# Altium PCB Bopit_pcb.PcbDoc
Units mil, origin at the board's own origin, x right, y up, seen from the top; angles counter-clockwise.
Board outline 2190 x 2275 mil, 2 copper layers (Top Layer, Bottom Layer); 20 components, 20 nets, 85 pads, 1 vias.
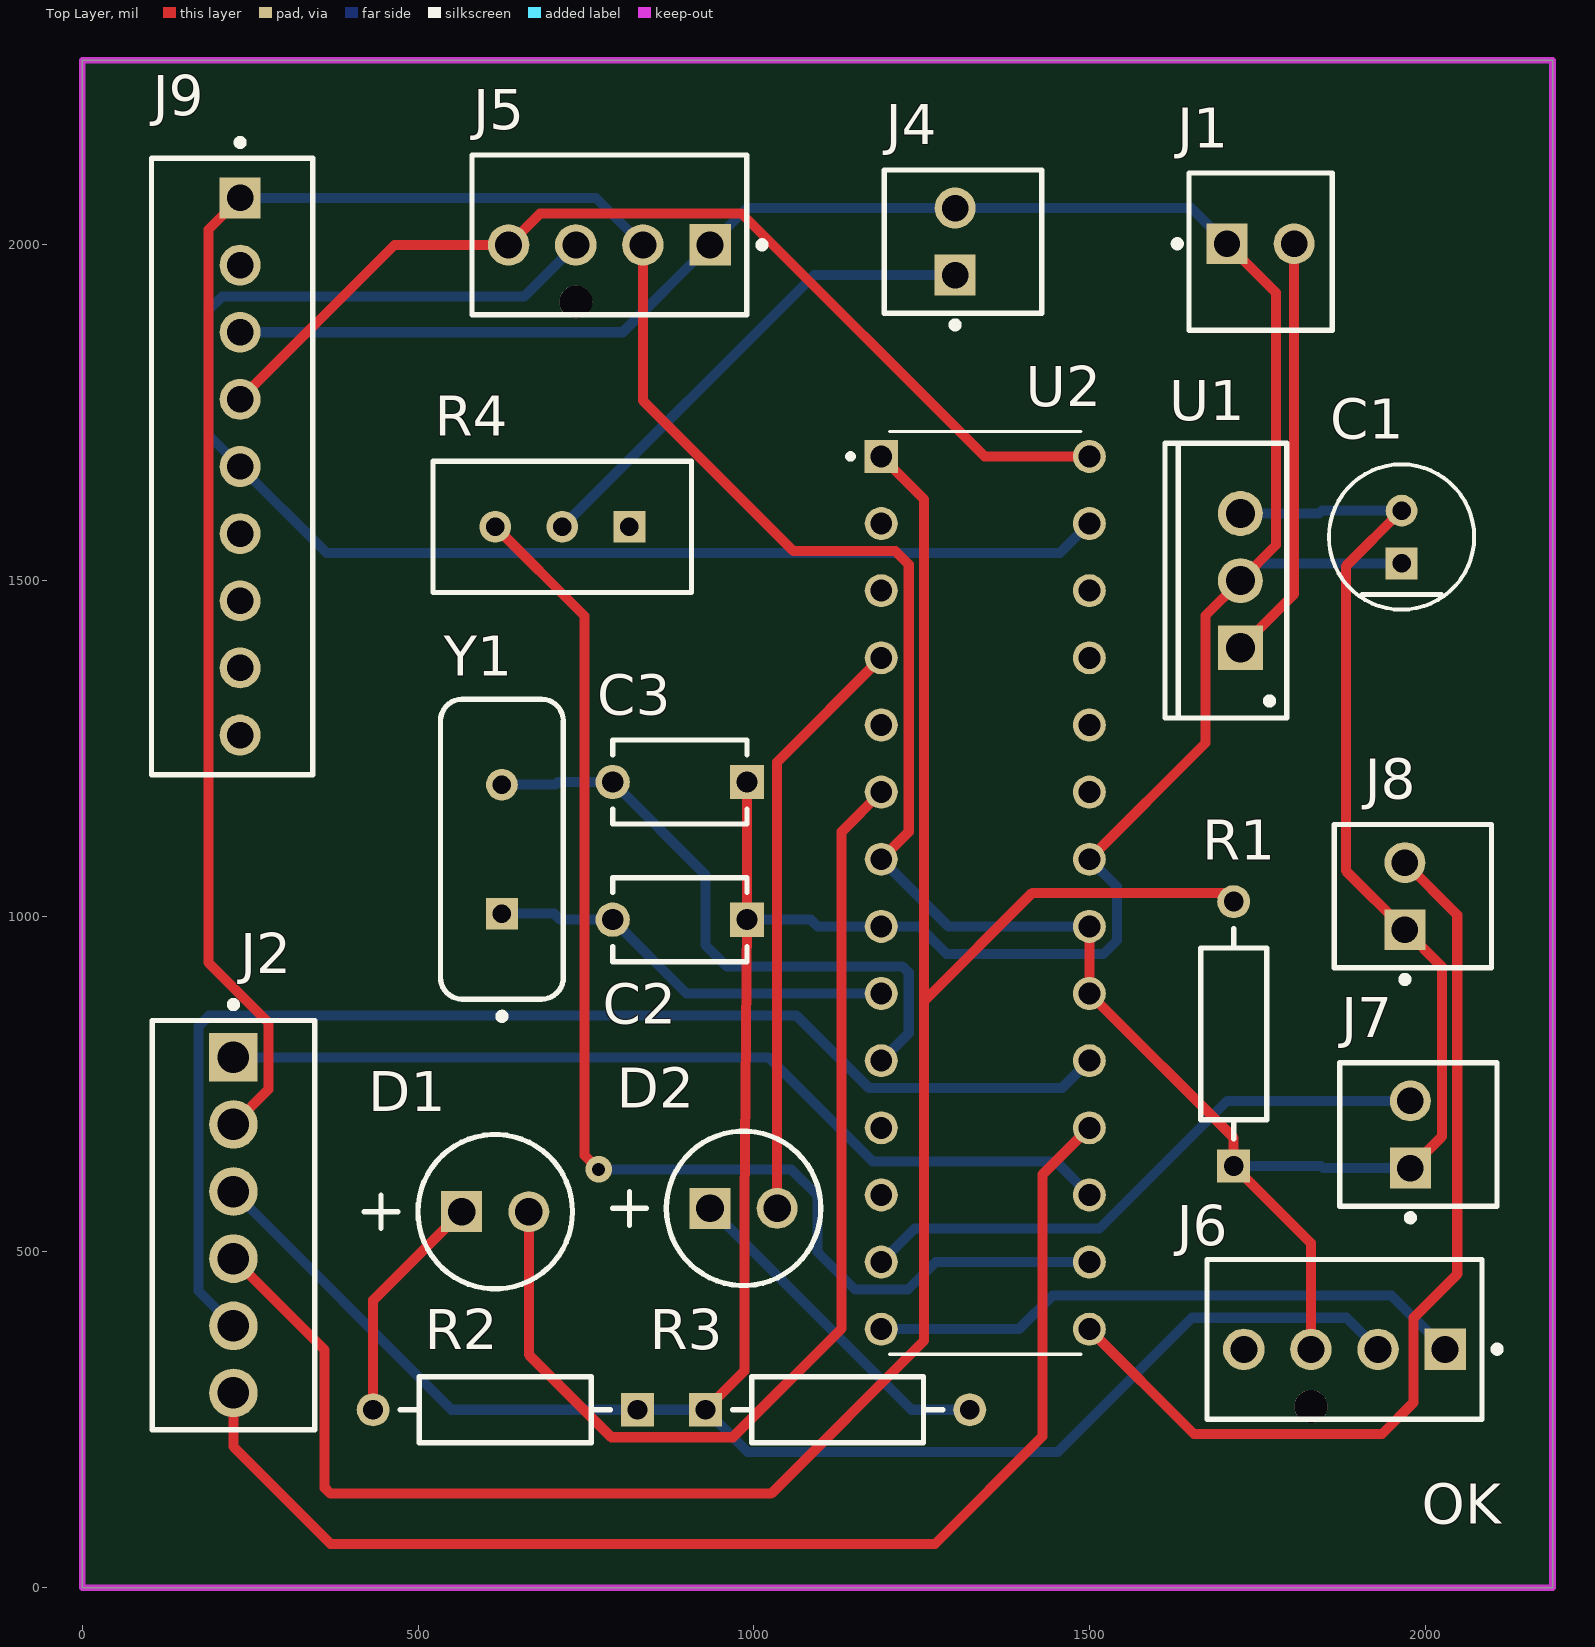
[diagram p0: Top Layer view]
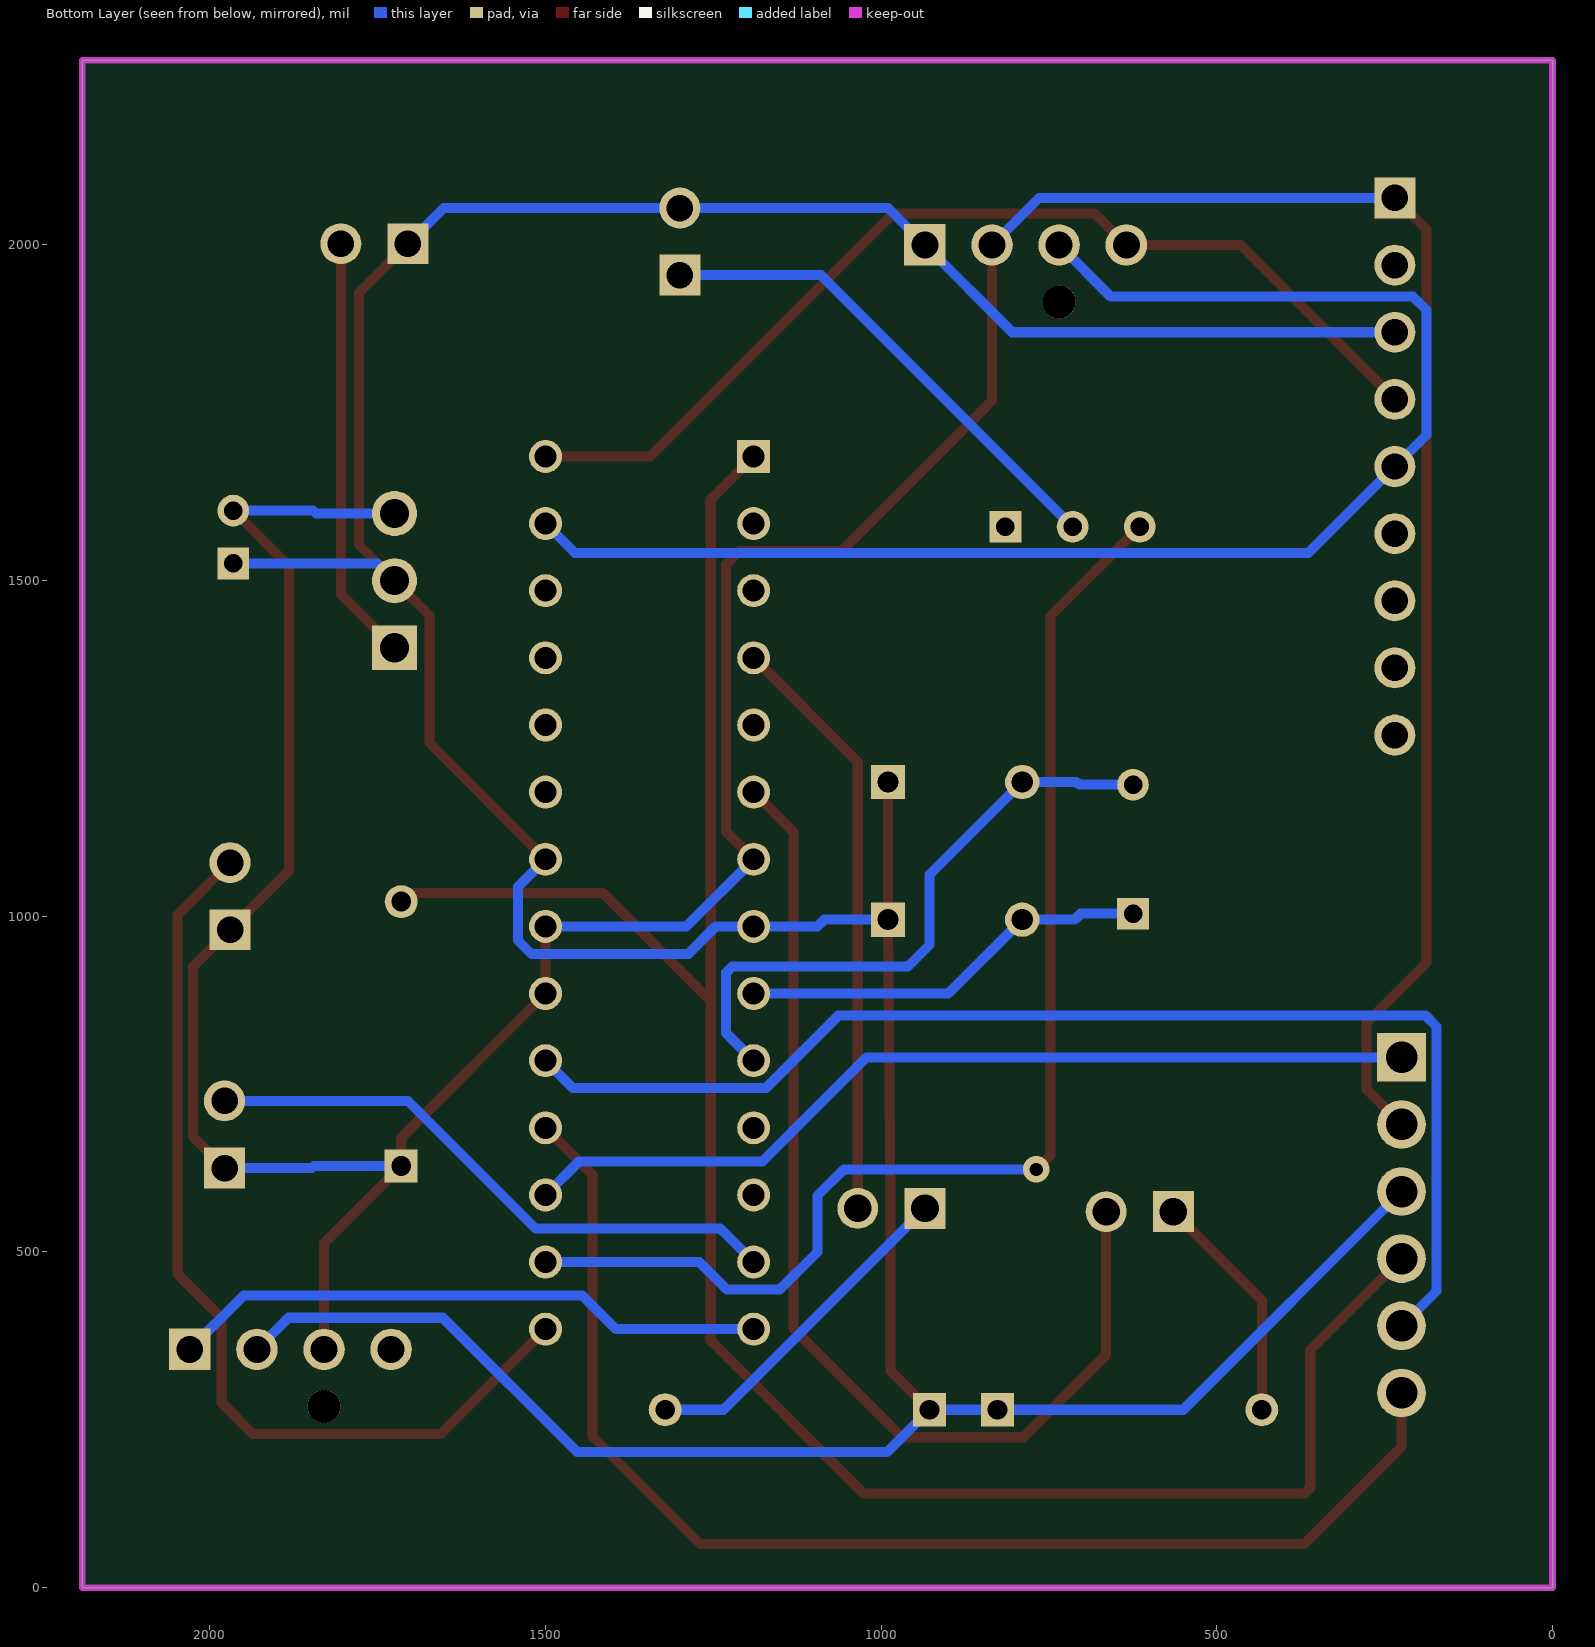
[diagram p1: Bottom Layer view, seen from below]
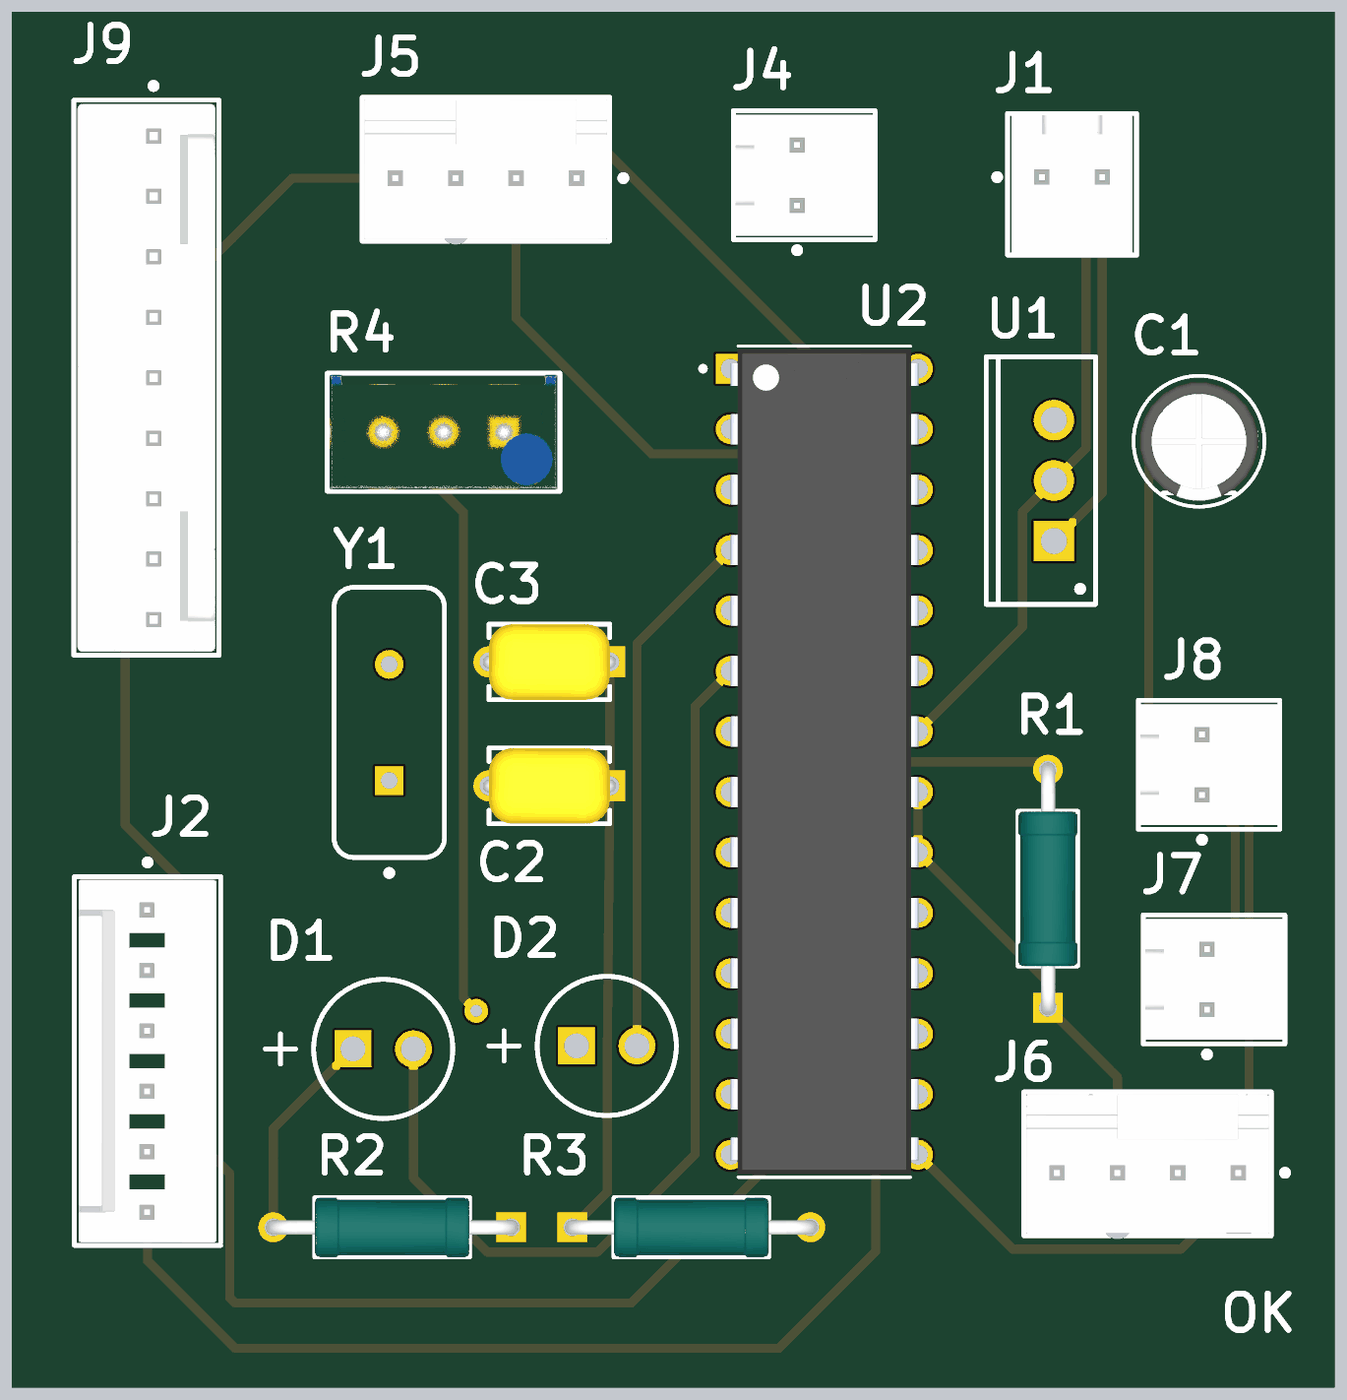
[diagram p2: 3D render of the assembled board from above, using the file's embedded part models]

## Layer stack, top to bottom
Top Solder: solder mask 0.4, Solder Resist, Dk 3.5
Top Layer: signal copper 1.4
Dielectric 1: dielectric 12.6, FR-4, Dk 4.8
Bottom Layer: signal copper 1.4
Bottom Solder: solder mask 0.4, Solder Resist, Dk 3.5

## Board outline
0,0 2190,0 2190,2275 0,2275

## Design rules (kind name [scope] priority, off if disabled: settings)
BoardOutlineClearance [All] p1: gap=7.87 ignorepadtopadclearanceinfootprint=FALSE except(15.75: Arc-SplitBarrior Arc-SplitContinuation Track-SplitBarrior Track-SplitContinuation SMDPad-SplitBarrior SMDPad-SplitContinuation THPad-SplitBarrior THPad-SplitContinuation Via-SplitBarrior Via-SplitContinuation Fill-SplitBarrior Fill-SplitContinuation Poly-SplitBarrior Poly-SplitContinuation Region-SplitBarrior Region-SplitContinuation Text-SplitBarrior Text-SplitContinuation)
Clearance "Clearance Bottom Layer" [OnLayer('Bottom Layer')] p1: gap=8 ignorepadtopadclearanceinfootprint=TRUE except(10: Arc-Text Track-Text SMDPad-Text THPad-Text Via-Text Fill-Text Poly-Text Region-Text Text-Text)
Clearance "Clearance Top Layer" [OnLayer('Top Layer')] p2: gap=8 ignorepadtopadclearanceinfootprint=TRUE except(10: Arc-Text Track-Text SMDPad-Text THPad-Text Via-Text Fill-Text Poly-Text Region-Text Text-Text)
Clearance [All] p3: gap=7.87 ignorepadtopadclearanceinfootprint=FALSE except(3.5: Arc-Arc Arc-Track Arc-SMDPad Track-Track Track-SMDPad SMDPad-SMDPad; 5: Arc-Via Track-Via SMDPad-Via THPad-Via Via-Via; 10: Arc-Text Track-Text SMDPad-Text THPad-Text Via-Text Fill-Text Poly-Text Region-Text Text-Text)
HoleSize [All] p1: absolutevalues=TRUE maxlimit=248.03 minlimit=7.87 maxpercent=80.000 minpercent=20.000
MinimumAnnularRing [All] p1: minimumring=3
MinimumSolderMaskSliver [All] p1: minsoldermaskwidth=3.94
PolygonConnect PolygonConnect_1 [All] p1: thpad.connectstyle=Relief thpad.reliefconductorwidth=20 thpad.reliefentries=4 thpad.polygonreliefangle="90 Angle" thpad.airgapwidth=10 smdpad.connectstyle=Relief smdpad.reliefconductorwidth=20 smdpad.reliefentries=4 smdpad.polygonreliefangle="90 Angle" smdpad.airgapwidth=10 via.connectstyle=Direct via.reliefconductorwidth=20 via.reliefentries=4 via.polygonreliefangle="90 Angle" via.airgapwidth=10
RoutingCorners [All] p1: cornerstyle=Round minsetback=100 maxsetback=100
RoutingVias [All] p1: holewidth=19.68 width=39.37 viastyle="Through Hole" minholewidth=7.87 minwidth=17.72 maxholewidth=39.37 maxwidth=78.74
SilkToSilkClearance [All] p1: silktosilkclearance=3.94
SilkToSolderMaskClearance [IsPad] p1: minsilkscreentomaskgap=3.94 clearancetoexposedcopper=TRUE
SolderMaskExpansion [All] p1: expansion=4 istentingtop=FALSE
Width [All] p1: maxlimit=100 minlimit=3.5 preferedwidth=15
25 further rules are at their usual default settings.

## Components (designator, comment, footprint, x,y, rotation, side; value= is the part's Value field where it differs from the comment)
C1 "10uF" FP-RAD-TH-D_5_0_5-L_11_1-MFG 1965,1565 r90 top
C2 "22 pF" FP-C322C104K5R5TA-MFG 890,995 r180 top
C3 "22 pF" FP-C322C104K5R5TA-MFG 890,1200 r180 top
D1 "Red" AVAG-HLMP-3301-2 565,560 r0 top
D2 "Green" AVAG-HLMP-3301-2 935,565 r0 top
J1 "Battery" FP-61900211121-MFG 1755,1990 r0 top
J2 "Input Code Pins" FP-22-27-2061-MFG 225,540 r270 top
J4 "Speaker" FP-61900211121-MFG 1311.81,2005 r90 top
J5 "Screen" FP-47053-3000-MFG 785,2014.96 r0 top
J6 "Sound Sensor" FP-47053-3000-MFG 1880,369.96 r0 top
J7 "Buy Button" FP-61900211121-MFG 1990,675 r90 top
J8 "Start input" FP-61900211121-MFG 1981.81,1030 r90 top
J9 "Gyroscope" FP-SWR25X-NRTC-S09-ST-BA-MFG 223.19,1670 r270 top
R1 "MRS25000C1001FCT00" FP-MRS25-MFG 1715,825 r90 top
R2 "MRS25000C1001FCT00" FP-MRS25-MFG 630,265 r180 top
R3 "MRS25000C1001FCT00" FP-MRS25-MFG 1125,265 r0 top
R4 "3296W-1-253LF" FP-3296W-MFG 715,1580 r90 top
U1 "5V Reg" TO220 1725,1500 r90 top
U2 "ATMEGA328-PU" DIP787W46P254L3467H508Q28 1345,1035 r0 top
Y1 "FOXSLF/080-20" FOX-FOXSLF080-20 625,1100 r90 top

## Footprints (in the part's own frame and the unit in brackets; to place one, negate y for a bottom-side part, rotate by r counter-clockwise, add the part's x,y. Pads: shape width x height; smd on the part's side, far side on the other; paste and mask are expansions set on the pad)
AVAG-HLMP-3301-2 [mm] "THD, 2-Leads, Body Dia 5.85mm"
  rect 1.55x1.55 hole 1.05: 1(0,0)
  round 1.55 hole 1.05: 2(2.54,0)
  silkscreen extent -3.68,-2.92 4.19,2.92
DIP787W46P254L3467H508Q28 [mm]
  rect 1.25x1.25 hole 0.83: 1(-3.937,16.51)
  round 1.25 hole 0.83: 2(-3.937,13.97) 3(-3.937,11.43) 4(-3.937,8.89) 5(-3.937,6.35) 6(-3.937,3.81) 7(-3.937,1.27) 8(-3.937,-1.27) 9(-3.937,-3.81) 10(-3.937,-6.35) 11(-3.937,-8.89) 12(-3.937,-11.43) 13(-3.937,-13.97) 14(-3.937,-16.51) 15(3.937,-16.51) 16(3.937,-13.97) 17(3.937,-11.43) 18(3.937,-8.89) 19(3.937,-6.35) 20(3.937,-3.81) 21(3.937,-1.27) 22(3.937,1.27) 23(3.937,3.81) 24(3.937,6.35) 25(3.937,8.89) 26(3.937,11.43) 27(3.937,13.97) 28(3.937,16.51)
  silkscreen extent -5.2,-17.45 3.62,17.45, body extent -3.95,-17.34 3.95,17.34, height 4.57
FOX-FOXSLF080-20 [mm] "THD, 2-Leads, Body 11.35x4.65mm"
  rect 1.2x1.2 hole 0.7: 1(-2.44,0)
  round 1.2 hole 0.7: 2(2.44,0)
  silkscreen extent -6.45,-2.33 5.68,2.33, body extent -5.67,-2.32 5.68,2.33, height 3.6
FP-22-27-2061-MFG [mm]
  rect 1.84x1.84 hole 1.19 paste-1000 mask+0: 1(-6.35,0)
  round 1.84 hole 1.19 paste-1000 mask+0: 2(-3.81,0) 3(-1.27,0) 4(1.27,0) 5(3.81,0) 6(6.35,0)
  silkscreen extent -8.47,-3.07 7.75,3.08, body extent -7.85,-3.18 7.85,3.17, height 0.25
FP-3296W-MFG [mm]
  rect 1.2x1.2 hole 0.7 paste-1000 mask+0: 1(0.005,-2.54)
  round 1.2 hole 0.7 paste-1000 mask+0: 2(0.005,0) 3(0.005,2.54)
  silkscreen extent -2.48,-4.89 2.48,4.89, body extent -2.58,-4.99 2.58,4.99, height 0.25
FP-47053-3000-MFG [mm]
  rect 1.57x1.57 hole 1.02 paste-1000 mask+0: 1(3.81,-0.38)
  round 1.57 hole 1.02 paste-1000 mask+0: 2(1.27,-0.38) 3(-1.27,-0.38) 4(-3.81,-0.38)
  round 1.25 hole 1.25 unplated paste-1000 mask+0: ""(-1.27,-2.54)
  silkscreen extent -5.2,-3.02 5.9,3.02, body extent -5.3,-3.26 5.3,3.12, height 0.25
FP-61900211121-MFG [mm]
  rect 1.55x1.55 hole 1 paste-1000 mask+0: 1(-1.27,0.3)
  round 1.55 hole 1 paste-1000 mask+0: 2(1.27,0.3)
  silkscreen extent -3.27,-2.98 2.71,2.98, body extent -2.81,-3.08 2.81,3.08, height 0.25
FP-C322C104K5R5TA-MFG [mm]
  rect 1.3x1.3 hole 0.8 paste-1000 mask+0: 1(-2.54,0)
  round 1.3 hole 0.8 paste-1000 mask+0: 2(2.54,0)
  silkscreen extent -2.54,-1.59 2.54,1.59, body extent -3.29,-1.69 3.29,1.69, height 0.25
FP-MRS25-MFG [mm]
  rect 1.25x1.25 hole 0.75 paste-1000 mask+0: 1(-5,0)
  round 1.25 hole 0.75 paste-1000 mask+0: 2(5,0)
  silkscreen extent -3.97,-1.25 3.97,1.25, body extent -5.72,-1.35 5.72,1.35, height 0.25
FP-RAD-TH-D_5_0_5-L_11_1-MFG [mm]
  rect 1.2x1.2 hole 0.7 paste-1000 mask+0: 1(-1,0)
  round 1.2 hole 0.7 paste-1000 mask+0: 2(1,0)
  silkscreen extent -2.75,-2.75 2.75,2.75, body extent -2.85,-2.85 2.85,2.85, height 0.25
FP-SWR25X-NRTC-S09-ST-BA-MFG [mm]
  rect 1.55x1.55 hole 1 paste-1000 mask+0: 1(-10.16,0.3)
  round 1.55 hole 1 paste-1000 mask+0: 2(-7.62,0.3) 3(-5.08,0.3) 4(-2.54,0.3) 5(0,0.3) 6(2.54,0.3) 7(5.08,0.3) 8(7.62,0.3) 9(10.16,0.3)
  silkscreen extent -12.38,-3.05 11.66,3.05, body extent -11.76,-3.15 11.76,3.15, height 0.25
TO220 [mm] "TO, Thru-Hole, Vertical, Heatsink Mounted; 3 In-Line Leads; Pitch 2.54 mm"
  rect 1.7x1.7 hole 1.1: 1(-2.54,0)
  round 1.7 hole 1.1: 2(0,0) 3(2.54,0)
  silkscreen extent -5.2,-1.75 5.2,2.85, body extent -5.25,-1.8 5.25,2.9, height 19.7

## Part data
C1: library part CMP-05427-000869-1, "Aluminum Electrolytic Capacitors (Radial Lead Type) 10uF ±20% 100V", Case/Package=Radial, Dielectric Material=Aluminium, Leakage Current=3uA, Max Operating Temperature=85°C, Min Operating Temperature=-40°C, Package Quantity=200, Ripple Current=70mA, Tolerance=20%, Voltage=100V, Capacitance=10uF, Construction=RADIAL, Contact Plating=Tin, Diameter=5mm, Dissipation Factor=0.1%, Height=11mm, Height - Seated (Max)=0.472inch, Lead Diameter=0.5mm, Lead Free="Lead Free", Lead Pitch=2mm, Lead/Base Style=Straight, Length=11mm, Life (Hours)=2000Hour, Mount="Through Hole", Number of Pins=2, Packaging=Bulk, Polarity=Polar, Radiation Hardening=No, REACH SVHC="No SVHC", Ripple Current (AC)=70mA, RoHS Compliant=Yes, Series=M, Termination=Radial, Voltage Rating=100V, Voltage Rating (DC)=100V, Width=5mm
C2 C3: library part CMP-03020-034661-1, "CAP CER 0.1UF 50V X7R RADIAL", Capacitance=100nF, Case/Package=Radial, Dielectric=X7R, Dielectric Material=Ceramic, Max Operating Temperature=125°C, Min Operating Temperature=-55°C, Package Quantity=500, Tolerance=10%, Voltage=50V, Construction=RADIAL, Depth=3.18mm, Dissipation Factor=2.5%, Height=3.18mm, Height - Seated (Max)=0.26inch, Lead Diameter=0.51mm, Lead Free="Lead Free", Lead Length=7mm, Lead Pitch=5.08mm, Lead/Base Style="Formed Leads", Length=5.08mm, Material=Ceramic, Mount="Through Hole", Number of Pins=2, Packaging=Bulk, Radiation Hardening=No, REACH SVHC="No SVHC", RoHS Compliant=Yes, Series="Golden Max™", Termination=Radial, Voltage Rating=50V, Voltage Rating (DC)=50V, Weight=0.0625lb, Width=0.125inch
D1: library part CMP-2000-06411-1, "T-1 3/4 (5 mm) Diffused LED Lamp, 1.9 V, -40 to 100 degC, 2-Pin THD, RoHS, Bulk", Forward Current=25mA, Forward Voltage=2.4V, Manufacturer=Avago, Operating Temp Range=-40Cto100C, Operating Temperature Classification=Industrial, Package Description="2-Pin Through Hole LED, Dia 5.85 mm", Package Reference=HLMP-3301, Package Type=T-13/4, Power Dissipation=85W, Reverse Voltage=5V, Test Current (It)=10mA, Chip Material=GaP, Datasheet URL=http://www.avagotech.com/docs/AV02-1558EN, Datasheet Version=03/2015, DELETED=Compliant, Dominant Wave Length=626nm, Emitting Color=Red, High Brightness=No, Lens Dimensions=5.08x5.08x8.3mm, Lens Type=ColoredDiffused, Lum Intensity=5.4mcd, Luminous Intensity=5.4mcd, Main Category=StandardLED, Manufacturer URL=http://www.avagotech.com/, Mounting=ThroughHole, Mounting Technology=ThroughHole, Number of  Elements=1, Packaging=TapeandReel, Peak Wavelength=635nm, Pin Count=2, Product Depth (mm)=6.1mm, Product Height (mm)=9.19mm, Product Length (mm)=6.1mm, Rad Hardened=No, Shape Type=Circular, Type=Uni-Color, Viewing Angle=60deg
D2: library part CMP-2000-06411-1, "T-1 3/4 (5 mm) Diffused LED Lamp, 1.9 V, -40 to 100 degC, 2-Pin THD, RoHS, Bulk", Emitting Color=Red, Forward Current=25mA, Forward Voltage=2.4V, Manufacturer=Avago, Operating Temp Range=-40Cto100C, Operating Temperature Classification=Industrial, Package Description="2-Pin Through Hole LED, Dia 5.85 mm", Package Reference=HLMP-3301, Package Type=T-13/4, Power Dissipation=85W, Reverse Voltage=5V, Test Current (It)=10mA, Chip Material=GaP, Datasheet URL=http://www.avagotech.com/docs/AV02-1558EN, Datasheet Version=03/2015, DELETED=Compliant, Dominant Wave Length=626nm, High Brightness=No, Lens Dimensions=5.08x5.08x8.3mm, Lens Type=ColoredDiffused, Lum Intensity=5.4mcd, Luminous Intensity=5.4mcd, Main Category=StandardLED, Manufacturer URL=http://www.avagotech.com/, Mounting=ThroughHole, Mounting Technology=ThroughHole, Number of  Elements=1, Packaging=TapeandReel, Peak Wavelength=635nm, Pin Count=2, Product Depth (mm)=6.1mm, Product Height (mm)=9.19mm, Product Length (mm)=6.1mm, Rad Hardened=No, Shape Type=Circular, Type=Uni-Color, Viewing Angle=60deg
J1 J4 J7 J8: library part CMP-1502-00584-2, "CONN HEADER VERT 2POS 2.54MM", Color=Beige, Current Rating=3A, Flammability Rating="UL94 V-0", Insulation Resistance=1GR, Max Operating Temperature=105°C, Min Operating Temperature=-40°C, Package Quantity=1000, Voltage Rating=250V, Connector Type=Header, Contact Finish - Mating=TIN, Contact Gender=Male, Contact Material="Copper Alloy", Contact Mating Length=0.295inch, Contact Plating=Tin, Contact Shape=Square, Contact Type="Male Pin", Fastening Type=Friction, Gender=Male, Height=14.2mm, Housing Material=Nylon, Insulation Color=Beige, Insulation Material=Nylon, Length=5.8mm, Mount="Through Hole", Number of Contacts=2, Number of Positions=2, Number of Rows=1, Packaging=Bulk, Pitch=2.54mm, RoHS Compliant=Yes, Series=WR-WTB, Termination="Through Hole", Width=5.12mm
J2: library part CMP-04776-000309-1, "CONN HEADER VERT 6POS 2.54MM", Color=Natural, Contact Resistance=10mR, Current Rating=4A, Flammability Rating="UL94 V-0", Housing Color=White, Max Operating Temperature=75°C, Max Voltage Rating (AC)=250V, Min Operating Temperature=0°C, Package Quantity=10000, Connector Type="Male Pin", Contact Material=Brass, Contact Mating Length=0.295inch, Contact Plating=Tin, Contact Type="Male Pin", Depth=5.8mm, Fastening Type=Friction, Gender=Male, Hole Diameter=1.02mm, Housing Material=Nylon, Lead Pitch=2.54mm, Length=15.24mm, Material=Nylon, Max Current Rating=4A, Mount="Through Hole", Number of Contacts=6, Number of Positions=6, Number of Rows=1, Orientation=Straight, Packaging=Bulk, Pitch=2.54mm, Radiation Hardening=No, REACH SVHC="No SVHC", Series=KK, Termination=Solder, Voltage Rating=250V, Voltage Rating (AC)=250V, Working Voltage=250V
J5 J6: library part CMP-04776-000447-1, "CONN HEADER VERT 4POS 2.54MM", Current Rating=4A, Max Operating Temperature=75°C, Min Operating Temperature=0°C, Package Quantity=12000, Voltage Rating=250V, Contact Material="Copper Alloy", Contact Plating=Tin, Gender=Male, Glow Wire Compliant=Non-compliant, Halogen Free="Low Halogen", Mount="Through Hole", Number of Circuits=4, Number of Contacts=4, Number of Positions=4, Number of Rows=1, Orientation=Straight, Packaging=Bulk, Pitch=2.54mm, REACH SVHC="No SVHC", RoHS Compliant=Yes, Series=47053, Termination="Through Hole"
J9: library part CMP-25680-000012-1, "CONN HEADER VERT 9POS 2.54MM", Current Rating=3A, Manufacturer=Sullins, Manufacturer Part Number=SWR25X-NRTC-S09-ST-BA, Package=0, Temperature="-25°C to +85°C", Temperature Range High=+85°C, Temperature Range Low=-25°C, Voltage Rating=250V, Automotive=No, Category=Conn, ComponentLink2Description=Datasheet, ComponentLink2URL=https://drawings-pdf.s3.amazonaws.com/11633.pdf, Conn Gender=Male, Conn Orientation=Straight, Contact Material=Tin,Nickel, Device Class L1=Connectors, Device Class L2="Headers and Wire Housings", Device Class L3=unset, Digikey Description="CONN HEADER VERT 9POS 2.54MM", Height=11.7mm, Lead Free=Yes, Number of Contacts=9, Number of Rows=1, Octopart=https://octopart.com/swr25x-nrtc-s09-st-ba-sullins-20912736, Pitch=2.54mm, RoHS=TRUE
R1 R2 R3: library part CMP-02408-000051-1, "RES 1K OHM 0.6W 1% AXIAL", Case/Package=Axial, Max Operating Temperature=155°C, Max Power Dissipation=600mW, Min Operating Temperature=-55°C, Package Quantity=5000, Resistance=1kR, Resistance Tolerance=1%, Resistor Type="Metal Film", Temperature Coefficient=50ppm/°C, Voltage Rating=350V, Construction=Cylindrical, Contact Plating=Tin, Diameter=2.5mm, Lead Diameter=0.6mm, Lead Free="Lead Free", Length=6.5mm, Military Standard=Not, Mount="Through Hole", Number of Pins=2, Number of Terminations=2, Packaging="Tape and Reel", Power Rating=600mW, Radiation Hardening=No, RoHS Compliant=Yes, Series=MRS25, Technology="THIN FILM", Termination=Axial, Tolerance=1%, Voltage Rating (DC)=350V, Weight=0.00776oz, Width=2.5mm
R4: library part CMP-07234-000034-1, "TRIMMER 25K OHM 0.5W PC PIN TOP", Color=Blue, Max Operating Temperature=125°C, Max Power Dissipation=500mW, Min Operating Temperature=-55°C, Package Quantity=50, Resistance=25kR, Resistance Tolerance=10%, Resistor Type=Cermet, Temperature Coefficient=100ppm/°C, Voltage Rating (DC)=300V, Depth=4.83mm, Height=0.395inch, Lead Free="Lead Free", Length=9.53mm, Military Standard=Not, Mount=Panel, Number of Turns=25, Packaging=Rail/Tube, Power Rating=500mW, Radiation Hardening=No, REACH SVHC="No SVHC", RoHS Compliant=Yes, Series=3296, Taper=Linear, Technology=CERMET, Termination=Pin, Tolerance=10%, Weight=0.03oz, Width=9.53mm
U1: library part CMP-0244-00483-1, "Positive Voltage Regulator, 5V, 3-Pin TO-220", ComponentLink1Description="Manufacturer URL", ComponentLink1URL=http://www.st.com, ComponentLink2Description=Datasheet, ComponentLink2URL=http://www.st.com/internet/com/TECHNICAL_RESOURCES/TECHNICAL_LITERATURE/DATASHEET/CD00000444.pdf, ComponentLink3Description="Package Specification", ComponentLink3URL=http://www.st.com/internet/com/TECHNICAL_RESOURCES/TECHNICAL_LITERATURE/PACKAGE_INFORMATION/CD00004649.pdf, DatasheetVersion=16/11/2011, PackageDescription="TO, Thru-Hole, Vertical, Heatsink Mounted; 3 In-Line Leads; Pitch 2.54 mm", PackageReference=TO220, PackageVersion=ver3.0
U2: "AVR AVRÂ® ATmega Microcontroller IC 8-Bit 20MHz 32KB (16K x 16) FLASH 28-PDIP", Package="DIP-28 Microchip Technology", Availability="In Stock", Check_prices=https://www.snapeda.com/parts/ATMEGA328-PU/Microchip/view-part/?ref=eda, MF="Microchip Technology", MP=ATMEGA328-PU, Price=None, Purchase-URL=https://pricing.snapeda.com/search/part/ATMEGA328-PU/?ref=eda, SnapEDA_Link=https://www.snapeda.com/parts/ATMEGA328-PU/Microchip/view-part/?ref=snap
Y1: library part CMP-1749-00002-1, "Resistance Weld Thru-Hole Crystal, 8 MHz, -20 to 70 degC, 2-Pin THD, RoHS, Bulk", Case\Package=TO-263-3, Dropout Voltage="2 V", Max Input Voltage="35 V", Max Operating Temperature="125 degC", Max Ouput Current="1 A", Min Input Voltage="7 V", Min Operating Temperature="0 degC", Nominal Output Voltage="5 V", Package Quantity=50, ComponentLink1Description="Manufacturer URL", ComponentLink1URL=http://www.foxonline.com/, ComponentLink2Description=Datasheet, ComponentLink2URL=http://download.siliconexpert.com/pdfs/2015/4/5/6/5/7/200/fox_/manual/35607121449963728hc49slf.pdf, DatasheetVersion=Mar-15, Height="30.02 mm", Length="10.24 mm", Mount="Surface Mount", Output Current="1 A", Output Voltage="5 V", Outputs=1, PackageDescription="2-Pin Through Hole Device, Body 11.35 x 4.65 mm", PackageReference=FOXSLF080-20, Packaging=Rail/Tube, Pins=3, Radiation Hardening=No, REACH SVHC="No SVHC", RoHSCompliant=true, Width="9.35 mm"

## Via types
v1: diameter 39.37, hole 19.68, Top Layer to Bottom Layer, 1 vias

## Nets (pads, with @x,y where several pads share a name; then routed paths per layer and width w, separated by ;. In a path a pad name is that pad's centre, name@x,y a point inside that pad or via, vN(x,y) a via of type N, cw(c..) or ccw(c..) an arc to the next point about the centre after c; other vN are vias at no path point)
GND: C1.1 C2.1 C3.1 J1.1 J2.3 J4.2 J5.1 J6.2 J9.3 R2.1 R3.1 U1.2 U2.8 U2.22 | length 6526.9
  Top Layer w15: R3.1 986,322.85 986,571 C2.1 C3.1 ; U2.22 1673,1258 1673,1448 U1.2 1778,1553 1778,1928.81 J1.1
  Bottom Layer w15: J2.3 550,265 R2.1 R3.1 991.15,202 1453,202 1653,402 1883,402 J6.2 ; J9.3 805,1870 J5.1 990,2055 J4.2 1651.81,2055 J1.1 ; C2.1 1085,995 1095,985 U2.8 1246.37,985 1287.37,944 1521,944 1541,964 1541,1044 U2.22 ; U1.2 1750.63,1525.63 C1.1
NetC1_2: C1.2 J2.2 J5.2 J6.3 J7.1 J8.1 J9.1 R1.1 U1.3 U2.7 U2.20 U2.21 | length 5988.7
  Top Layer w15: J2.2 277,742 277,842 188,931 188,2023 J9.1 ; J5.2 835,1768 1059,1544 1211,1544 1231,1524 1231,1126 U2.7 ; U2.21 U2.20 1715,670 R1.1 1830,513.15 J6.3 ; C1.2 1882,1521.37 1882,1068 J8.1 2025,925 2025,671.81 J7.1
  Bottom Layer w15: J9.1 765,2070 J5.2 ; U2.7 1290,985 U2.21 ; R1.1 1845,628.15 1848.15,625 J7.1 ; U1.3 1842,1600 1846.37,1604.37 C1.2
NetC2_2: C2.2 U2.9 Y1.1 | length 614.3
  Bottom Layer w15: Y1.1 703,1003.94 711.94,995 C2.2 900,885 U2.9
NetC3_2: C3.2 U2.10 Y1.2 | length 934.7
  Bottom Layer w15: Y1.2 705,1196.06 708.94,1200 C3.2 928,1062 928,957.11 960,925.11 1221.89,925.11 1231,916 1231,826 U2.10
NetD1_1: D1.1 R2.2 | length 349.6
  Top Layer w15: R2.2 433.15,428.15 D1.1
NetD1_2: D1.2 U2.6 | length 1620.5
  Top Layer w15: D1.2 665,347 788,224 969,224 1131,386 1131,1126 U2.6
NetD2_1: D2.1 R3.2 | length 511.1
  Bottom Layer w15: D2.1 1235,265 R3.2
NetD2_2: D2.2 U2.4 | length 884.2
  Top Layer w15: D2.2 1035,1230 U2.4
NetJ2_1: J2.1 U2.17 | length 1359.9
  Bottom Layer w15: J2.1 1022,790 1177,635 1450,635 U2.17
NetJ2_4: J2.4 R1.2 U2.1 | length 3265.3
  Top Layer w15: J2.4 361,354 361,148.79 369.79,140 1026,140 1254,368 1254,874 ; U2.1 1254,1621 1254,874 ; R1.2 1701.85,1035 1415,1035 1254,874
NetJ2_5: J2.5 U2.19 | length 1862.9
  Bottom Layer w15: J2.5 173,442 173,836 189,852 1064,852 1172,744 1459,744 U2.19
NetJ2_6: J2.6 U2.18 | length 1900.3
  Top Layer w15: J2.6 225,210 370,65 1270,65 1430,225 1430,615 U2.18
NetJ4_1: J4.1 R4.2 | length 740.2
  Bottom Layer w15: R4.2 1089.8,1955 J4.1
NetJ5_3: J5.3 J9.5 U2.27 | length 2176.3
  Bottom Layer w15: J5.3 658,1923 208,1923 188,1903 188,1717 J9.5 364,1541 1456,1541 U2.27
NetJ5_4: J5.4 J9.4 U2.28 | length 1529.7
  Top Layer w15: J9.4 465,2000 J5.4 682,2047 982,2047 1344,1685 U2.28
NetJ6_1: J6.1 U2.14 | length 893.8
  Bottom Layer w15: U2.14 1395,385 1445,435 1950,435 J6.1
NetJ7_2: J7.2 U2.13 | length 887.6
  Bottom Layer w15: U2.13 1240,535 1515,535 1705,725 J7.2
NetJ8_2: J8.2 U2.15 | length 1430.3
  Top Layer w15: U2.15 1656,229 1936,229 1983,276 1983,402 2048,467 2048,1002 J8.2
NetR4_3: R4.3 U2.16 | length 1892.3
  Top Layer w15: R4.3 748,1447.2 748,644 v1(769,623)
  Bottom Layer w15: v1(769,623) 1056,623 1095,584 1095,500 1151,444 1230,444 1271,485 U2.16
VCC: J1.2 U1.1 | length 634.9
  Top Layer w15: U1.1 1805,1480 J1.2
pads on no net: J5. J6. J6.4 J9.2 J9.6 J9.7 J9.8 J9.9 R4.1 U2.2 U2.3 U2.5 U2.11 U2.12 U2.23 U2.24 U2.25 U2.26

## Keep-outs
Keep-Out Layer:
  the board outline again, w10

## Silkscreen, mask and mechanical layers (free items; w line width, h text height)
Top Overlay:
  text "OK" at 1995,95 h60